# EAGLE board SuperFX_revA_final_2 (EAGLE 9.6.2)
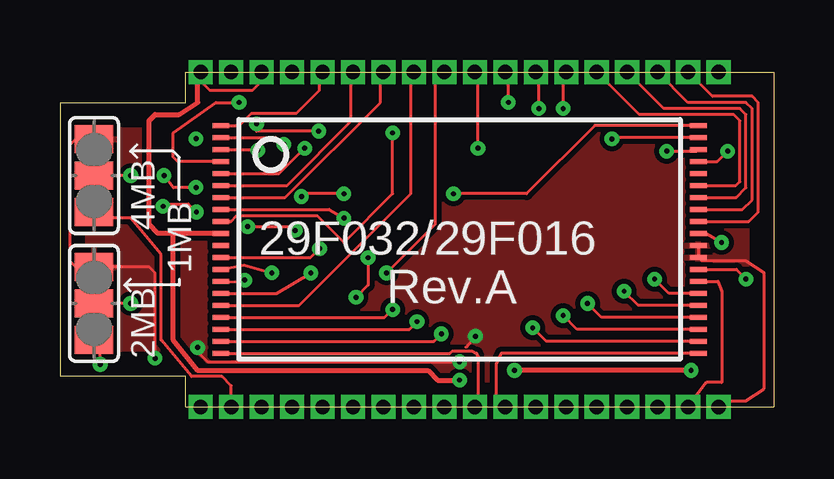
[diagram p0: board, top side]
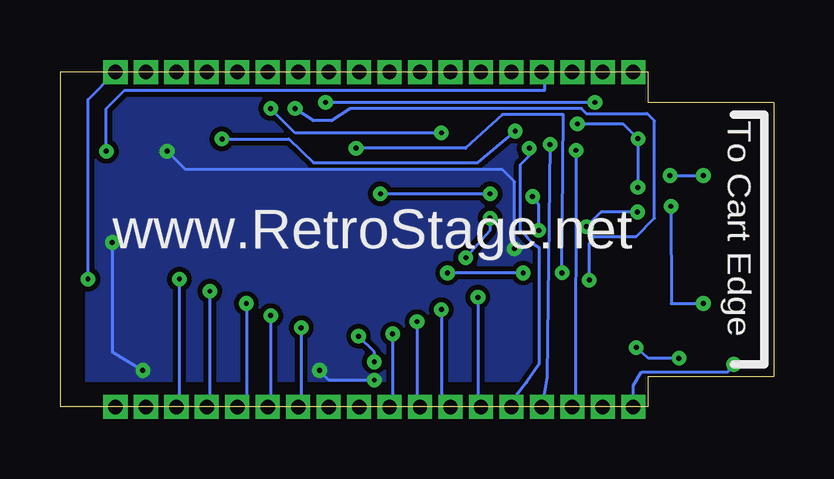
[diagram p1: board, bottom side, seen from below]

Size 29.77 x 13.97 mm. Coordinates in mm from the lower left corner, seen from the top.
Outline: 5.23,0 29.77,0 29.77,13.97 5.23,13.97 5.23,12.7 0,12.7 0,1.27 5.23,1.27 5.23,0
Copper layers (1*16): Top 0.035mm / dielectric 1.5mm / Bottom 0.035mm
Design rules "default": minimum track width 0.13mm, minimum drill 0.4mm, track to track 8mil, track to pad 8mil, pad to pad 8mil, via to via 8mil, smd to smd 8mil, copper to edge 40mil, drill to drill 8mil, minimum pad ring 10mil, minimum via ring 8mil, stop-mask expansion 4mil, vias tented up to drill 20mil, thermal gap 10mil

## Footprints (pad centres in the part's own frame; a part is rotated, then mirrored left to right if it is on the bottom)
SJ_2 = smd 1.168 x 1.6: 1 -1.524,0; 2 0,0; 3 1.524,0
40-TSOP = smd 0.7 x 0.2: 1 -9.95,4.75; 2 -9.95,4.25; 3 -9.95,3.75; 4 -9.95,3.25; 5 -9.95,2.75; 6 -9.95,2.25; 7 -9.95,1.75; 8 -9.95,1.25; 9 -9.95,0.75; 10 -9.95,0.25; 11 -9.95,-0.25; 12 -9.95,-0.75; 13 -9.95,-1.25; 14 -9.95,-1.75; 15 -9.95,-2.25; 16 -9.95,-2.75; 17 -9.95,-3.25; 18 -9.95,-3.75; 19 -9.95,-4.25; 20 -9.95,-4.75; 21 9.95,-4.75; 22 9.95,-4.25; 23 9.95,-3.75; 24 9.95,-3.25; 25 9.95,-2.75; 26 9.95,-2.25; 27 9.95,-1.75; 28 9.95,-1.25; 29 9.95,-0.75; 30 9.95,-0.25; 31 9.95,0.25; 32 9.95,0.75; 33 9.95,1.25; 34 9.95,1.75; 35 9.95,2.25; 36 9.95,2.75; 37 9.95,3.25; 38 9.95,3.75; 39 9.95,4.25; 40 9.95,4.75

## Placement (x,y rotation side)
20  [SJ_2]  1.42,4.32 90 top
21  [SJ_2]  1.42,9.65 90 top
U$1  AM29F032B-E  [40-TSOP]  16.66,6.98 0 top

## Library data of the parts
20 21 = jumper
U$1 = snes-cart

## Nets
A0: U$1.24
A1: U$1.23
A2: U$1.22
A3: U$1.21
A4: U$1.20
A5: U$1.19
A6: U$1.18
A7: U$1.17
A8: U$1.16
A9: U$1.15
A10: U$1.14
A11: U$1.13
A12: U$1.8
A13: U$1.7
A14: U$1.6
A15: U$1.5
A16: U$1.4
A17: U$1.3
A18: U$1.2
A19: U$1.1
A20: 20.1
A21: 21.1
CE: U$1.9
D0: U$1.25
D1: U$1.26
D2: U$1.27
D3: U$1.28
D4: U$1.32
D5: U$1.33
D6: U$1.34
D7: U$1.35
GND: 20.3 21.3 U$1.29 U$1.30
N$37: 21.2 U$1.39
N$38: 20.2 U$1.40
OE: U$1.37
VCC: U$1.10 U$1.12 U$1.31 U$1.38

## Tracks (layer width: path | path; a pad name or v marks a point on that pad's centre or on a via)
A0  (via drill 0.2, 0.6)
  Top 0.13: U$1.24 22.58,3.74 v22,4.32
  Bottom 0.13: v22,4.32 22,0.38 v22.38,0
A1  (via drill 0.2, 0.6)
  Top 0.13: U$1.23 21.56,3.24 v20.98,3.81
  Bottom 0.13: v20.98,3.81 20.98,0.13 v21.11,0
A2  (via drill 0.2, 0.6)
  Top 0.13: U$1.22 20.28,2.74 v19.71,3.3
  Bottom 0.13: v19.71,3.3 19.71,0.13 v19.84,0
A3  (via drill 0.6)
  Top 0.13: U$1.21 18.39,2.24 18.19,1.78 18.19,0.38 v18.57,0
A4  (via drill 0.6)
  Top 0.13: v17.3,0 17.42,0.13 17.42,2.08 17.37,2.24 17.17,2.34 16.36,2.34 16.26,2.24 U$1.20
A5  (via drill 0.2, 0.6)
  Top 0.13: U$1.19 15.59,2.74 v15.9,3.05
  Bottom 0.13: v15.9,3.05 15.9,0.13 v16.03,0
A6  (via drill 0.2, 0.6)
  Top 0.13: U$1.18 14.56,3.24 v14.88,3.56
  Bottom 0.13: v14.88,3.56 14.88,0.13 v14.76,0
A7  (via drill 0.2, 0.6)
  Top 0.13: U$1.17 13.54,3.74 v13.87,4.06
  Bottom 0.13: v13.87,4.06 13.87,0.38 v13.49,0
A8  (via drill 0.6)
  Top 0.13: U$1.16 9.98,4.24 14.63,8.89 14.63,13.84 v14.76,13.97
A9  (via drill 0.2, 0.6)
  Top 0.13: U$1.15 9.03,4.73 v10.46,5.59 | v13.61,5.59 15.65,7.62 15.65,13.59 v16.03,13.97
  Bottom 0.13: v10.46,5.59 v13.61,5.59
A10  (via drill 0.2, 0.6)
  Top 0.13: U$1.14 7.55,5.22 v7.7,5.29 | v19.96,12.45 19.96,13.84 v19.84,13.97
  Bottom 0.13: v7.7,5.29 7.69,6.84 7.52,7.11 5.74,7.11 4.98,7.87 4.98,11.94 5.28,12.24 7.82,12.24 8.03,12.45 17.68,12.45 18.44,11.94 19.2,11.94 v19.96,12.45
A11  (via drill 0.2, 0.6)
  Top 0.13: U$1.13 7.68,5.92 v8.84,5.59 | v17.42,10.79 17.42,13.84 v17.3,13.97
  Bottom 0.13: v8.84,5.59 8.79,12.19 11.33,12.19 12.85,10.79 v17.42,10.79
A12  (via drill 0.2, 0.6)
  Top 0.13: U$1.8 11.22,8.24 v11.84,7.87 | v12.85,6.22 12.85,5.08 v12.34,4.57
  Bottom 0.13: v11.84,7.87 11.84,7.37 v12.85,6.22 | v12.34,4.57 12.34,0.13 v12.22,0
A13  (via drill 0.6)
  Top 0.13: U$1.7 9.4,8.74 13.36,12.7 13.36,13.84 v13.49,13.97
A14  (via drill 0.6)
  Top 0.13: U$1.6 9.47,9.24 12.14,11.93 12.14,13.86 v12.22,13.97
A15  (via drill 0.2, 0.6)
  Top 0.13: U$1.5 9.13,9.74 v10.2,10.79
  Bottom 0.13: v10.95,0 10.82,0.38 10.31,1.02 9.8,1.78 9.8,6.65 10.02,6.8 10.26,7.04 10.41,7.21 10.57,7.37 10.57,10.11 10.2,10.47 v10.2,10.79
A16  (via drill 0.2, 0.6)
  Top 0.13: U$1.4 4.9,10.24 4.72,10.41 4.72,11.43 6.5,12.7 v7.47,12.7 | v18.69,12.7 18.69,13.84 v18.57,13.97
  Bottom 0.13: v7.47,12.7 v18.69,12.7
A17  (via drill 0.2, 0.6)
  Top 0.13: U$1.3 8.21,10.74 v8.25,10.7
  Bottom 0.13: v8.25,10.7 8.28,0.13 v8.41,0
A18  (via drill 0.2, 0.6)
  Top 0.13: U$1.2 8.98,11.24 v9.34,10.95
  Bottom 0.13: v9.34,10.95 9.46,1.21 v9.68,0
A19  (via drill 0.6)
  Top 0.13: v10.95,13.97 10.82,13.84 10.82,13.21 9.96,12.34 9.85,12.24 9.65,12.24 7.98,12.24 7.47,11.74 U$1.1
A20  (via drill 0.2, 0.6)
  Top 0.13: v1.68,1.78 1.68,2.54 20.1
  Bottom 0.13: v5.87,0 5.87,0.89 5.53,1.46 1.94,1.46 v1.68,1.78
A21  (via drill 0.6)
  Top 0.13: v7.14,0 7.14,0.89 6.76,1.27 5.49,1.27 4.22,2.79 4.22,6.35 2.95,7.87 1.68,7.87 21.1
CE  (via drill 0.2, 0.6)
  Top 0.13: v13.87,11.43 13.87,8.89 11.84,6.86 10.72,7.98 7.37,7.98 7.13,7.74 U$1.9 | v20.98,12.45 20.98,13.84 v21.11,13.97
  Bottom 0.13: v13.87,11.43 19.96,11.43 v20.98,12.45
D0  (via drill 0.2, 0.6)
  Top 0.13: U$1.25 24.11,4.24 v23.52,4.83
  Bottom 0.13: v23.52,4.83 23.52,0.13 v23.65,0
D1  (via drill 0.2, 0.6)
  Top 0.13: U$1.26 25.39,4.74 v24.79,5.33
  Bottom 0.13: v24.79,5.33 24.79,0.13 v24.92,0
D2  (via drill 0.6)
  Top 0.13: U$1.27 27.43,5.24 27.58,4.83 27.58,1.02 26.95,1.02 v26.19,0
D3  (via drill 0.2, 0.6)
  Top 0.13: U$1.28 28.2,5.74 v28.6,5.33
  Bottom 0.13: v28.6,5.33 28.6,12.83 v27.46,13.97
D4  (via drill 0.6)
  Top 0.13: U$1.32 28.72,7.74 29.11,8.13 29.11,12.7 28.85,12.95 27.2,12.95 v26.19,13.97
D5  (via drill 0.6)
  Top 0.13: U$1.33 28.45,8.24 28.85,8.64 28.85,12.45 28.6,12.7 26.19,12.7 v24.92,13.97
D6  (via drill 0.6)
  Top 0.13: U$1.34 28.19,8.74 28.6,9.14 28.6,12.19 28.35,12.45 25.17,12.45 v23.65,13.97
D7  (via drill 0.6)
  Top 0.13: U$1.35 28.18,9.24 28.35,9.4 28.35,11.94 28.09,12.19 24.16,12.19 v22.38,13.97
GND  (via drill 0.2, 0.6)
  Top 0.13: v27.46,0 27.58,0 27.84,0.25 28.6,0.25 29.36,0.76 29.36,5.59 28.6,6.1 26.75,6.1 U$1.29 U$1.30 | 16.92,2.49 v17.32,2.95 | 21.3 0.66,11.18 0.41,10.92 0.41,6.1 0.66,5.84 20.3 3.71,5.84 3.96,5.59 v3.96,2.03 | v5.74,2.48 5.74,2.29 6.15,1.88 v16.66,1.88
  Bottom 0.13: v3.96,2.03 5.23,2.03 v5.74,2.48 | v16.66,1.88 16.66,2.29 v17.32,2.95
  pour Top: -2.13,14.48 30.38,14.48 30.38,-0.25 -2.13,-0.25
N$37  (via drill 0.2)
  Top 0.13: U$1.39 23.07,11.24 v23.01,11.18 | v5.67,9.15 4.72,9.14 v4.34,9.65 | v2.95,9.65 21.2 | v10.79,11.5 8.2,11.5 v8.2,11.81
  Bottom 0.13: v23.01,11.18 20.22,11.18 19.2,10.19 12.34,10.19 v10.79,11.5 | v5.67,9.15 v5.67,11.19 6.29,11.81 v8.2,11.81 | v4.34,9.65 v2.95,9.65
N$38  (via drill 0.2)
  Top 0.13: U$1.40 22.3,11.74 19.46,8.89 v16.41,8.89 | v11.84,8.89 10.06,8.89 10.07,8.9 v10.07,8.78 | v4.3,8.37 4.48,8.47 5.35,8.47 v5.69,8.13 | v2.95,4.32 20.2 | v7.82,7.52 9.65,7.52 v9.8,7.37
  Bottom 0.13: v16.41,8.89 v11.84,8.89 | v4.3,8.37 4.29,4.31 v2.95,4.32 | v5.69,8.13 7.21,8.13 v7.82,7.52 | v9.8,7.37 9.8,8.43 v10.07,8.78
OE  (via drill 0.2, 0.6)
  Top 0.13: U$1.37 27.41,10.24 v27.84,10.67
  Bottom 0.13: v27.84,10.67 27.84,12.45 27.08,13.21 9.55,13.21 9.55,13.84 v9.68,13.97
S$1  (via drill 0.6)
  other vias: 7.14,13.97
VCC  (via drill 0.2, 0.6)
  Top 0.13: 5.74,13.84 v5.87,13.97 5.87,13.84 | U$1.31 26.95,7.24 v27.58,6.86 | U$1.12 10.45,6.24 v10.82,6.6 | v25.3,10.67 26.55,10.67 U$1.38 | 5.99,13.72 5.99,13.46 6.25,13.21 8.03,13.21 8.28,13.46 8.28,13.84 v8.41,13.97
  Top 0.2: U$1.10 4.72,7.24 | 4.72,7.24 4.09,7.24 3.71,7.62 3.71,11.94 3.96,12.19 4.98,12.19 5.74,12.7 5.74,13.84 | v26.31,1.52 v18.95,1.52 | 4.72,7.24 4.72,2.79 5.74,1.52 15.34,1.52 15.75,1.12 v16.66,1.12 | 5.87,13.84 5.99,13.72
  Bottom 0.13: v27.58,6.86 27.58,2.29 v26.31,1.52 | v10.82,6.6 10.82,9.4 11.33,9.91 24.54,9.91 v25.3,10.67 | v16.66,1.12 18.54,1.12 v18.95,1.52
  pour Bottom: -1.88,14.48 29.77,14.48 29.77,-0.25 -1.88,-0.25

## Text on the board
tNames: 4MB | 1MB | 29F032/29F016 | Rev.A | 2MB
bNames: To Cart Edge | www.RetroStage.net